# Altium PCB qav90.PcbDoc (part 7 of 7)
Units mm, origin at the board's own origin, x right, y up, seen from the top; angles counter-clockwise.
Board outline 90 x 90 mm, 3 copper layers (Top Layer, Mid-Layer 1, Bottom Layer); 214 components, 77 nets, 727 pads, 256 vias.
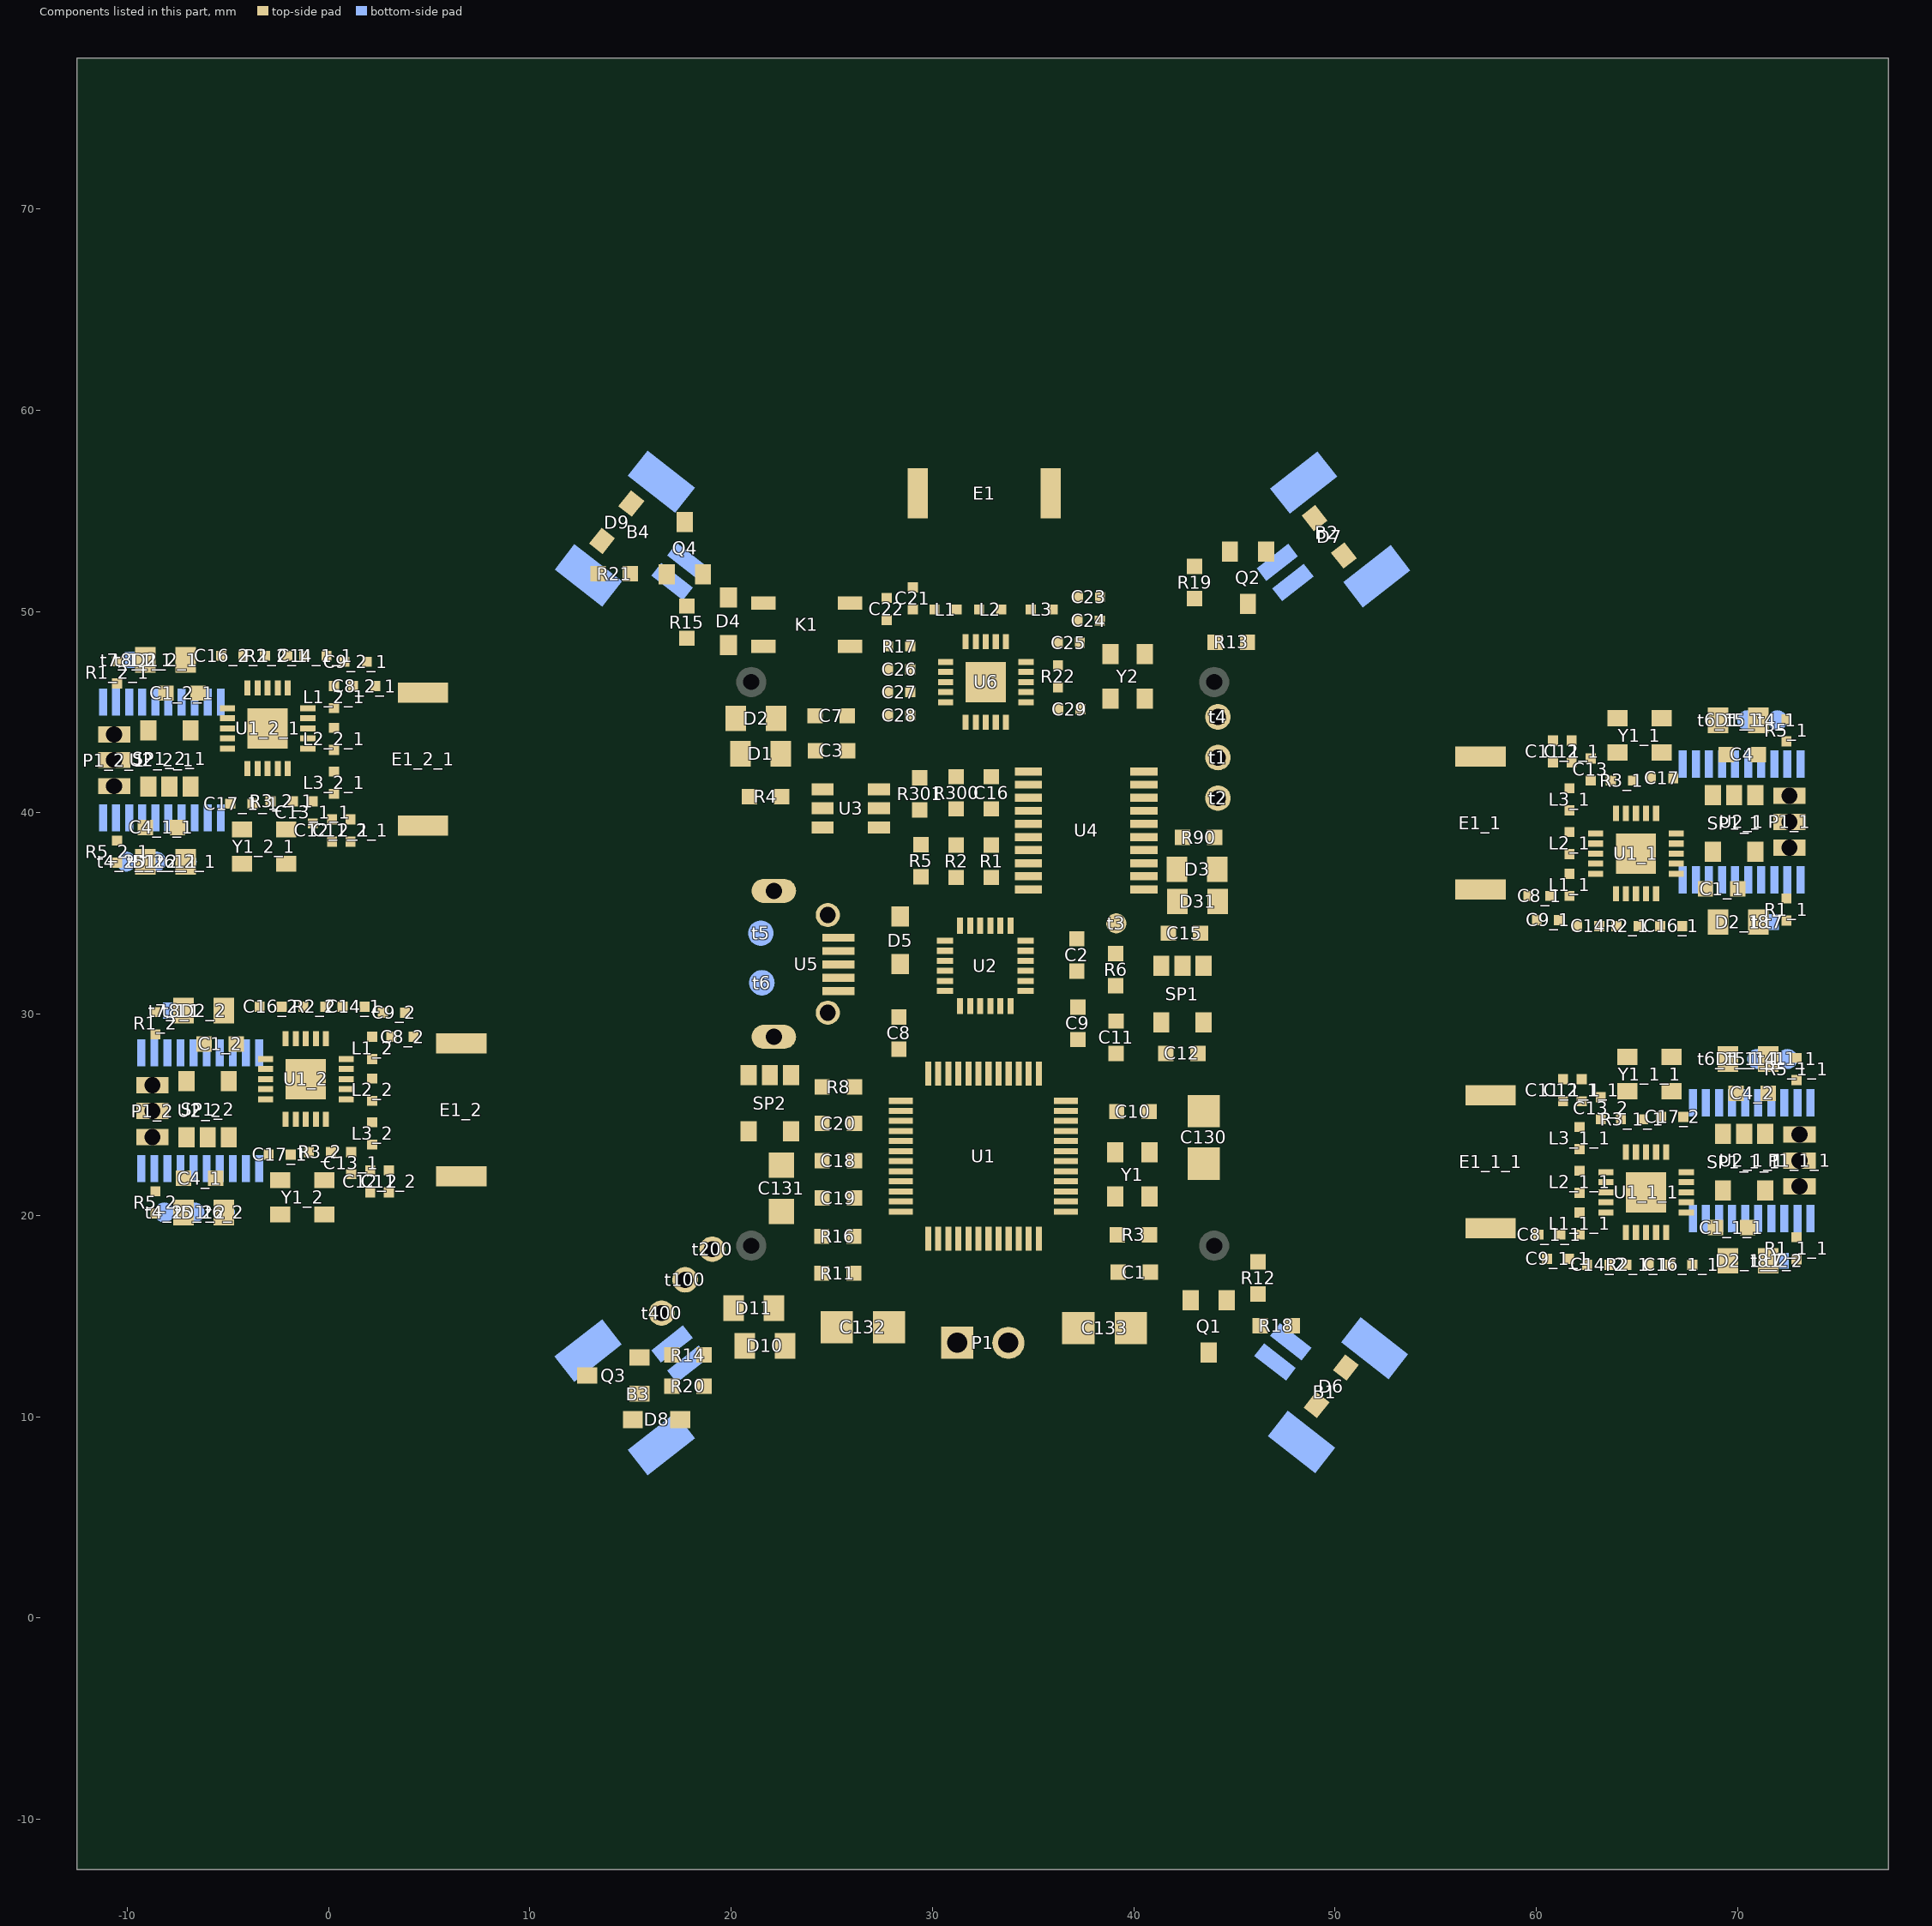
[diagram p7: the components of this part, seen from the top]

## Via types
v1: diameter 0.55, hole 0.25, Top Layer to Bottom Layer, tented both sides, 248 vias
v2: diameter 0.55, hole 0.25, Top Layer to Bottom Layer, 8 vias

## Nets (pads, with @x,y where several pads share a name; then routed paths per layer and width w, separated by ;. In a path a pad name is that pad's centre, name@x,y a point inside that pad or via, vN(x,y) a via of type N, cw(c..) or ccw(c..) an arc to the next point about the centre after c; other vN are vias at no path point) (continued)
copper on no net: (continued)
  Bottom Layer w0.508: -11.2,45.5 -11.2,44.45 ; -10.65,42.625 -10.25,42.625 ; -10.205,43.761 cw(c-10.088,43.398) -9.818,43.668 ; -9.3,28.075 -9.3,27.025 ; v1(-9.281,43.173) -9.281,43.221 -9.96,43.9 -10.65,43.9 -11.2,44.45 ; -9.2,47.6 -8.75,48.05 ; -8.75,25.2 -8.35,25.2 ; -8.6,39.75 -8.6,45.5 -8.6,46.675 -8.075,47.2 -5.975,47.2 -5.619,47.556 -4.431,47.556 -3.513,46.638 -3.438,46.638 ; -8.305,26.336 cw(c-8.188,25.973) -7.918,26.243 ; -7.925,39.725 -7.925,38.45 -7.05,37.575 ; -7.906,39.783 -7.906,41.269 v1(-7.9,41.275) -7.875,41.3 v1(-7.875,43.675) ; v1(-7.381,25.748) -7.381,25.796 -8.06,26.475 -8.75,26.475 -9.3,27.025 ; -7.3,30.175 -6.85,30.625 ; -6.7,22.325 -6.7,28.075 -6.7,29.25 -6.175,29.775 -4.075,29.775 -3.719,30.131 -2.531,30.131 -1.613,29.213 -1.538,29.213 ; v1(-6.1,48.05) -8.75,48.05 ; -6.025,22.3 -6.025,21.025 -5.15,20.15 ; -6.006,22.358 -6.006,23.844 v1(-6,23.85) -5.975,23.875 v1(-5.975,26.25) ; v1(-5.375,38.425) -0.975,38.425 v1(-0.5,38.9) -1.2,39.6 -1.2,44.2 ; v1(-4.2,30.625) -6.85,30.625 ; v1(-3.525,41.275) -4.025,41.775 -4.025,46.05 -3.438,46.638 ; v1(-3.475,21) 0.925,21 v1(1.4,21.475) 0.7,22.175 0.7,26.775 ; v1(-3.15,47.775) v1@-0.15,47.775 ; v1(-2.525,43.725) -2.05,44.2 -1.2,44.2 ; v1(-1.625,23.85) -2.125,24.35 -2.125,28.625 -1.538,29.213 ; v1(-1.25,30.35) v1@1.75,30.35 ; v1(-0.925,46.875) -1.1,47.05 v1(-3.025,47.05) -3.438,46.638 ; v1(-0.625,26.3) -0.15,26.775 0.7,26.775 ; v1(-0.125,47.75) -0.125,45.275 -1.2,44.2 ; v1(0.975,29.45) 0.8,29.625 v1(-1.125,29.625) -1.538,29.213 ; v1(1.775,30.325) 1.775,27.85 0.7,26.775 ; v1(62.05,34.425) 62.05,36.9 63.125,37.975 ; v1@62.075,34.4 v1(65.075,34.4) ; v1(62.55,17.6) 62.55,20.075 63.625,21.15 ; v1@62.575,17.575 v1(65.575,17.575) ; v1(62.85,35.3) 63.025,35.125 v1(64.95,35.125) 65.363,35.538 ; v1(63.35,18.475) 63.525,18.3 v1(65.45,18.3) 65.863,18.713 ; v1(64.45,38.45) 63.975,37.975 63.125,37.975 ; v1(64.95,21.625) 64.475,21.15 63.625,21.15 ; v1(65.45,40.9) 65.95,40.4 65.95,36.125 65.363,35.538 ; v1(65.95,24.075) 66.45,23.575 66.45,19.3 65.863,18.713 ; v1(67.3,43.75) 62.9,43.75 v1(62.425,43.275) 63.125,42.575 63.125,37.975 ; v1(67.8,26.925) 63.4,26.925 v1(62.925,26.45) 63.625,25.75 63.625,21.15 ; v1(68.025,34.125) 70.675,34.125 ; v1(68.525,17.3) 71.175,17.3 ; 68.975,44.6 69.85,43.725 69.85,42.45 ; 69.475,27.775 70.35,26.9 70.35,25.625 ; v1(69.8,38.5) 69.8,40.875 v1(69.825,40.9) 69.831,40.906 69.831,42.392 ; v1(70.3,21.675) 70.3,24.05 v1(70.325,24.075) 70.331,24.081 70.331,25.567 ; 70.525,42.425 70.525,36.675 70.525,35.5 70,34.975 67.9,34.975 67.544,34.619 66.356,34.619 65.438,35.538 65.363,35.538 ; 71.025,25.6 71.025,19.85 71.025,18.675 70.5,18.15 68.4,18.15 68.044,17.794 66.856,17.794 65.938,18.713 65.863,18.713 ; 71.125,34.575 70.675,34.125 ; v1(71.206,39.002) 71.206,38.954 71.885,38.275 72.575,38.275 73.125,37.725 ; 71.625,17.75 71.175,17.3 ; v1(71.706,22.177) 71.706,22.129 72.385,21.45 73.075,21.45 73.625,20.9 ; 71.743,38.507 ccw(c72.013,38.777) 72.13,38.414 ; 72.175,39.55 72.575,39.55 ; 72.243,21.682 ccw(c72.513,21.952) 72.63,21.589 ; 72.675,22.725 73.075,22.725 ; 73.125,36.675 73.125,37.725 ; 73.625,19.85 73.625,20.9 ; -11.2,44.45 ccw(c-10.687,44.45) -10.97,44.022 ; -11.2,44.45 cw(c-11.45,44.2) -11.167,43.987 ; -11.2,44.45 ccw(c-10.687,44.45) -10.97,44.022 ; -11.2,44.45 cw(c-11.45,44.2) -11.167,43.987 ; -11.2,44.45 ccw(c-10.687,44.45) -10.97,44.022 ; -11.2,44.45 cw(c-11.45,44.2) -11.167,43.987 ; -11.2,44.615 ccw(c-10.335,44.615) -10.947,44.003 ; -11.2,44.615 ccw(c-10.335,44.615) -10.947,44.003 ; -11.2,44.615 ccw(c-10.335,44.615) -10.947,44.003 ; -11.161,43.995 ccw(c-11.374,44.179) -11.13,44.32 ; -11.161,43.995 ccw(c-11.374,44.179) -11.13,44.32 ; -11.161,43.995 ccw(c-11.374,44.179) -11.13,44.32 ; -10.25,43.754 cw(c-10.25,42.702) -9.506,43.446 ; -10.25,43.754 cw(c-10.25,42.702) -9.506,43.446 ; -10.25,43.754 cw(c-10.25,42.702) -9.506,43.446 ; -10.124,43.973 ccw(c-9.401,44.39) -9.617,43.584 ; -10.124,43.973 ccw(c-9.401,44.39) -9.617,43.584 ; -10.124,43.973 ccw(c-9.401,44.39) -9.617,43.584 ; -9.523,43.456 cw(c-9.76,43.044) v1@-9.302,43.167 ; -9.523,43.456 cw(c-9.76,43.044) v1@-9.302,43.167 ; -9.523,43.456 cw(c-9.76,43.044) v1@-9.302,43.167 ; -9.523,43.456 cw(c-9.76,43.044) v1@-9.302,43.167 ; -9.523,43.456 cw(c-9.76,43.044) v1@-9.302,43.167 ; -9.523,43.456 cw(c-9.76,43.044) v1@-9.302,43.167 ; -9.3,27.025 cw(c-9.55,26.775) -9.267,26.562 ; -9.3,27.025 ccw(c-8.787,27.025) -9.07,26.597 ; -9.3,27.025 cw(c-9.55,26.775) -9.267,26.562 ; -9.3,27.025 ccw(c-8.787,27.025) -9.07,26.597 ; -9.3,27.025 cw(c-9.55,26.775) -9.267,26.562 ; -9.3,27.025 ccw(c-8.787,27.025) -9.07,26.597 ; -9.3,27.19 ccw(c-8.435,27.19) -9.047,26.578 ; -9.3,27.19 ccw(c-8.435,27.19) -9.047,26.578 ; -9.3,27.19 ccw(c-8.435,27.19) -9.047,26.578 ; -9.261,26.57 ccw(c-9.474,26.754) -9.23,26.895 ; -9.261,26.57 ccw(c-9.474,26.754) -9.23,26.895 ; -9.261,26.57 ccw(c-9.474,26.754) -9.23,26.895 ; -9.204,47.752 cw(c-8.75,47.556) -8.75,48.05 ; -9.204,47.752 cw(c-8.75,47.556) -8.75,48.05 ; -9.204,47.752 cw(c-8.75,47.556) -8.75,48.05 ; -9.203,47.753 cw(c-8.485,47.035) -8.485,48.05 ; -9.203,47.753 cw(c-8.485,47.035) -8.485,48.05 ; -9.203,47.753 cw(c-8.485,47.035) -8.485,48.05 ; -9.2,47.746 ccw(c-9.2,48.098) -8.951,47.849 ; -9.2,47.746 ccw(c-9.2,48.098) -8.951,47.849 ; -9.2,47.746 ccw(c-9.2,48.098) -8.951,47.849 ; v1@-8.965,44.04 ccw(c-9.846,44.921) -8.6,44.921 ; v1@-8.965,44.04 ccw(c-9.846,44.921) -8.6,44.921 ; v1@-8.965,44.04 ccw(c-9.846,44.921) -8.6,44.921 ; -8.35,26.329 cw(c-8.35,25.277) -7.606,26.021 ; -8.35,26.329 cw(c-8.35,25.277) -7.606,26.021 ; -8.35,26.329 cw(c-8.35,25.277) -7.606,26.021 ; -8.224,26.548 ccw(c-7.501,26.965) -7.717,26.159 ; -8.224,26.548 ccw(c-7.501,26.965) -7.717,26.159 ; -8.224,26.548 ccw(c-7.501,26.965) -7.717,26.159 ; -7.623,26.031 cw(c-7.86,25.619) v1@-7.402,25.742 ; -7.623,26.031 cw(c-7.86,25.619) v1@-7.402,25.742 ; -7.623,26.031 cw(c-7.86,25.619) v1@-7.402,25.742 ; -7.623,26.031 cw(c-7.86,25.619) v1@-7.402,25.742 ; -7.623,26.031 cw(c-7.86,25.619) v1@-7.402,25.742 ; -7.623,26.031 cw(c-7.86,25.619) v1@-7.402,25.742 ; -7.47,37.995 cw(c-7.89,37.575) -7.296,37.575 ; -7.47,37.995 ccw(c-7.05,38.415) -7.05,37.821 ; -7.47,37.995 cw(c-7.89,37.575) -7.296,37.575 ; -7.47,37.995 ccw(c-7.05,38.415) -7.05,37.821 ; -7.47,37.995 cw(c-7.89,37.575) -7.296,37.575 ; -7.47,37.995 ccw(c-7.05,38.415) -7.05,37.821 ; -7.304,30.327 cw(c-6.85,30.131) -6.85,30.625 ; -7.304,30.327 cw(c-6.85,30.131) -6.85,30.625 ; -7.304,30.327 cw(c-6.85,30.131) -6.85,30.625 ; -7.303,30.328 cw(c-6.585,29.61) -6.585,30.625 ; -7.303,30.328 cw(c-6.585,29.61) -6.585,30.625 ; -7.303,30.328 cw(c-6.585,29.61) -6.585,30.625 ; -7.3,30.321 ccw(c-7.3,30.673) -7.051,30.424 ; -7.3,30.321 ccw(c-7.3,30.673) -7.051,30.424 ; -7.3,30.321 ccw(c-7.3,30.673) -7.051,30.424 ; v1@-7.065,26.615 ccw(c-7.946,27.496) -6.7,27.496 ; v1@-7.065,26.615 ccw(c-7.946,27.496) -6.7,27.496 ; v1@-7.065,26.615 ccw(c-7.946,27.496) -6.7,27.496 ; -5.57,20.57 ccw(c-5.15,20.99) -5.15,20.396 ; -5.57,20.57 cw(c-5.99,20.15) -5.396,20.15 ; -5.57,20.57 ccw(c-5.15,20.99) -5.15,20.396 ; -5.57,20.57 cw(c-5.99,20.15) -5.396,20.15 ; -5.57,20.57 ccw(c-5.15,20.99) -5.15,20.396 ; -5.57,20.57 cw(c-5.99,20.15) -5.396,20.15 ; -1.398,47.05 cw(c-1.398,46.402) v1@-0.94,46.86 ; -1.398,47.05 cw(c-1.398,46.402) v1@-0.94,46.86 ; -1.398,47.05 cw(c-1.398,46.402) v1@-0.94,46.86 ; 0.502,29.625 cw(c0.502,28.977) v1@0.96,29.435 ; 0.502,29.625 cw(c0.502,28.977) v1@0.96,29.435 ; 0.502,29.625 cw(c0.502,28.977) v1@0.96,29.435 ; v1@62.865,35.315 ccw(c63.323,35.773) 63.323,35.125 ; v1@62.865,35.315 ccw(c63.323,35.773) 63.323,35.125 ; v1@62.865,35.315 ccw(c63.323,35.773) 63.323,35.125 ; v1@63.365,18.49 ccw(c63.823,18.948) 63.823,18.3 ; v1@63.365,18.49 ccw(c63.823,18.948) 63.823,18.3 ; v1@63.365,18.49 ccw(c63.823,18.948) 63.823,18.3 ; 68.975,44.354 cw(c68.975,43.76) 69.395,44.18 ; 68.975,44.354 cw(c68.975,43.76) 69.395,44.18 ; 68.975,44.354 cw(c68.975,43.76) 69.395,44.18 ; 69.221,44.6 ccw(c69.815,44.6) 69.395,44.18 ; 69.221,44.6 ccw(c69.815,44.6) 69.395,44.18 ; 69.221,44.6 ccw(c69.815,44.6) 69.395,44.18 ; 69.475,27.529 cw(c69.475,26.935) 69.895,27.355 ; 69.475,27.529 cw(c69.475,26.935) 69.895,27.355 ; 69.475,27.529 cw(c69.475,26.935) 69.895,27.355 ; 69.721,27.775 ccw(c70.315,27.775) 69.895,27.355 ; 69.721,27.775 ccw(c70.315,27.775) 69.895,27.355 ; 69.721,27.775 ccw(c70.315,27.775) 69.895,27.355 ; 70.41,34.125 ccw(c70.41,35.14) 71.128,34.422 ; 70.41,34.125 ccw(c70.41,35.14) 71.128,34.422 ; 70.41,34.125 ccw(c70.41,35.14) 71.128,34.422 ; 70.525,37.254 cw(c71.771,37.254) v1@70.89,38.135 ; 70.525,37.254 cw(c71.771,37.254) v1@70.89,38.135 ; 70.525,37.254 cw(c71.771,37.254) v1@70.89,38.135 ; 70.675,34.125 ccw(c70.675,34.619) 71.129,34.423 ; 70.675,34.125 ccw(c70.675,34.619) 71.129,34.423 ; 70.675,34.125 ccw(c70.675,34.619) 71.129,34.423 ; 70.876,34.326 cw(c71.125,34.077) 71.125,34.429 ; 70.876,34.326 cw(c71.125,34.077) 71.125,34.429 ; 70.876,34.326 cw(c71.125,34.077) 71.125,34.429 ; 70.91,17.3 ccw(c70.91,18.315) 71.628,17.597 ; 70.91,17.3 ccw(c70.91,18.315) 71.628,17.597 ; 70.91,17.3 ccw(c70.91,18.315) 71.628,17.597 ; 71.025,20.429 cw(c72.271,20.429) v1@71.39,21.31 ; 71.025,20.429 cw(c72.271,20.429) v1@71.39,21.31 ; 71.025,20.429 cw(c72.271,20.429) v1@71.39,21.31 ; 71.175,17.3 ccw(c71.175,17.794) 71.629,17.598 ; 71.175,17.3 ccw(c71.175,17.794) 71.629,17.598 ; 71.175,17.3 ccw(c71.175,17.794) 71.629,17.598 ; v1@71.227,39.008 ccw(c71.685,39.131) 71.448,38.719 ; v1@71.227,39.008 ccw(c71.685,39.131) 71.448,38.719 ; v1@71.227,39.008 ccw(c71.685,39.131) 71.448,38.719 ; v1@71.227,39.008 ccw(c71.685,39.131) 71.448,38.719 ; v1@71.227,39.008 ccw(c71.685,39.131) 71.448,38.719 ; v1@71.227,39.008 ccw(c71.685,39.131) 71.448,38.719 ; 71.376,17.501 cw(c71.625,17.252) 71.625,17.604 ; 71.376,17.501 cw(c71.625,17.252) 71.625,17.604 ; 71.376,17.501 cw(c71.625,17.252) 71.625,17.604 ; 71.431,38.729 ccw(c72.175,39.473) 72.175,38.421 ; 71.431,38.729 ccw(c72.175,39.473) 72.175,38.421 ; 71.431,38.729 ccw(c72.175,39.473) 72.175,38.421 ; 71.542,38.591 cw(c71.326,37.785) 72.049,38.202 ; 71.542,38.591 cw(c71.326,37.785) 72.049,38.202 ; 71.542,38.591 cw(c71.326,37.785) 72.049,38.202 ; v1@71.727,22.183 ccw(c72.185,22.306) 71.948,21.894 ; v1@71.727,22.183 ccw(c72.185,22.306) 71.948,21.894 ; v1@71.727,22.183 ccw(c72.185,22.306) 71.948,21.894 ; v1@71.727,22.183 ccw(c72.185,22.306) 71.948,21.894 ; v1@71.727,22.183 ccw(c72.185,22.306) 71.948,21.894 ; v1@71.727,22.183 ccw(c72.185,22.306) 71.948,21.894 ; 71.931,21.904 ccw(c72.675,22.648) 72.675,21.596 ; 71.931,21.904 ccw(c72.675,22.648) 72.675,21.596 ; 71.931,21.904 ccw(c72.675,22.648) 72.675,21.596 ; 72.042,21.766 cw(c71.826,20.96) 72.549,21.377 ; 72.042,21.766 cw(c71.826,20.96) 72.549,21.377 ; 72.042,21.766 cw(c71.826,20.96) 72.549,21.377 ; 72.872,38.172 cw(c72.26,37.56) 73.125,37.56 ; 72.872,38.172 cw(c72.26,37.56) 73.125,37.56 ; 72.872,38.172 cw(c72.26,37.56) 73.125,37.56 ; 72.895,38.153 cw(c72.612,37.725) 73.125,37.725 ; 72.895,38.153 cw(c72.612,37.725) 73.125,37.725 ; 72.895,38.153 cw(c72.612,37.725) 73.125,37.725 ; 73.055,37.855 cw(c73.299,37.996) 73.086,38.18 ; 73.055,37.855 cw(c73.299,37.996) 73.086,38.18 ; 73.055,37.855 cw(c73.299,37.996) 73.086,38.18 ; 73.092,38.188 ccw(c73.375,37.975) 73.125,37.725 ; 73.092,38.188 ccw(c73.375,37.975) 73.125,37.725 ; 73.092,38.188 ccw(c73.375,37.975) 73.125,37.725 ; 73.372,21.347 cw(c72.76,20.735) 73.625,20.735 ; 73.372,21.347 cw(c72.76,20.735) 73.625,20.735 ; 73.372,21.347 cw(c72.76,20.735) 73.625,20.735 ; 73.395,21.328 cw(c73.112,20.9) 73.625,20.9 ; 73.395,21.328 cw(c73.112,20.9) 73.625,20.9 ; 73.395,21.328 cw(c73.112,20.9) 73.625,20.9 ; 73.555,21.03 cw(c73.799,21.171) 73.586,21.355 ; 73.555,21.03 cw(c73.799,21.171) 73.586,21.355 ; 73.555,21.03 cw(c73.799,21.171) 73.586,21.355 ; 73.592,21.363 ccw(c73.875,21.15) 73.625,20.9 ; 73.592,21.363 ccw(c73.875,21.15) 73.625,20.9 ; 73.592,21.363 ccw(c73.875,21.15) 73.625,20.9
  other v1: 73.575,18.4 67.9,18.625 -4.05,19.825 65.75,20.7 65.75,21.55 68.35,23.825 -4.025,24.1 68.425,24.775 -1.425,26.375 -1.425,27.225 68.375,28.1 -3.575,29.3 -9.25,29.525 73.075,35.225 67.4,35.45 -5.95,37.25 65.25,37.525 65.25,38.375 67.85,40.65 -5.925,41.525 67.925,41.6 -3.325,43.8 -3.325,44.65 67.875,44.925 -5.475,46.725 -11.15,46.95
  other v2: 2.125,20 1.125,20.025 63.2,27.9 62.2,27.925 0.225,37.425 -0.775,37.45 62.7,44.725 61.7,44.75

## Polygon pours and split planes (outlines as drawn)
no net on Top Layer "Keep-Out Layer-No Net" (solid, remove dead copper, pour order 6): 8.275,49.575 7.55,48.85 7.55,33.775 -13.5,33.775 -14.45,34.725 -13.75,35.425 -13.75,49.45
no net on Top Layer "Keep-Out Layer-No Net" (solid, remove dead copper, pour order 6): 54.15,15.775 54.875,16.5 54.875,31.575 75.925,31.575 76.875,30.625 76.175,29.925 76.175,15.9
no net on Top Layer "Keep-Out Layer-No Net" (solid, remove dead copper, pour order 6): 10.175,32.15 9.45,31.425 9.45,16.35 -11.6,16.35 -12.55,17.3 -11.85,18 -11.85,32.025
no net on Top Layer "Keep-Out Layer-No Net" (solid, remove dead copper, pour order 6): 53.65,32.6 54.375,33.325 54.375,48.4 75.425,48.4 76.375,47.45 75.675,46.75 75.675,32.725
GND on Top Layer "Keep-Out Layer-No Net" (solid, remove dead copper, pour order 5): 2.05,67.3 8,61.35 67.675,61.35 67.675,12.6 61.65,6.575 56.1,1.025 9.025,1.025
no net on Bottom Layer "Keep-Out Layer-No Net" (solid, remove dead copper, pour order 8): 7.7,48.25 7.7,33.9 8.35,33.25 7.675,33.925 -13.3,33.925 -13.3,49.575 -12.8,50.075
no net on Bottom Layer "Keep-Out Layer-No Net" (solid, remove dead copper, pour order 8): 54.725,17.1 54.725,31.45 54.075,32.1 54.75,31.425 75.725,31.425 75.725,15.775 75.225,15.275
no net on Bottom Layer "Keep-Out Layer-No Net" (solid, remove dead copper, pour order 8): 9.6,30.825 9.6,16.475 10.25,15.825 9.575,16.5 -11.4,16.5 -11.4,32.15 -10.9,32.65
no net on Bottom Layer "Keep-Out Layer-No Net" (solid, remove dead copper, pour order 8): 54.225,33.925 54.225,48.275 53.575,48.925 54.25,48.25 75.225,48.25 75.225,32.6 74.725,32.1
GND on Bottom Layer "Keep-Out Layer-No Net" (solid, remove dead copper, pour order 7): 4.825,64.125 59.35,64.125 59.825,63.65 61.1,62.375 61.1,16.1 61.1,6.575 53.4,-1.125 52.05,0.225 7.6,0.225

## Keep-outs
Keep-Out Layer:
  circle w0.254: c2.875,2.5 r1
  circle w0.254: c62.325,2.575 r1
  circle w0.254: c62.125,62.675 r1
  circle w0.254: c2.85,62.5 r1
  lines w0.25: 5.717,57.273 10.814,53.291 ; 5.93,7.893 10.745,11.655 ; 8.809,2.528 14.374,6.876 ; 9.366,62.037 14.345,58.146 ; 50.605,6.893 55.86,2.787 ; 50.626,58.124 56.072,62.379 ; 54.229,11.676 59.259,7.746 ; 54.25,53.341 59.109,57.137
  lines w0.254: 1.012,6.926 ccw(c0,0) 6.904,-1.155 ; 1.019,6.933 ccw(c2.043,14.651) 6.072,7.989 ; 1.094,58.079 cw(c2.118,50.361) 5.74,57.253 ; 1.155,58.096 cw(c0,65) 6.879,66.298 ; 2.572,2.411 ccw(c0,0) 2.59,2.391 ; 2.572,62.589 cw(c0,65) 2.602,62.621 ; 6.25,38.65 cw(c4.25,38.65) 4.25,36.65 -9.75,36.65 cw(c-9.75,38.65) -11.75,38.65 -11.75,46.65 cw(c-9.75,46.65) -9.75,48.65 4.25,48.65 cw(c4.25,46.65) 6.25,46.65 6.25,44.825 ; 6.275,38.8 14.875,38.8 ccw(c15.963,39.837) 17,38.75 20,38.75 20,26.728 17.111,26.728 ccw(c16.074,25.64) 14.986,26.678 8.153,26.678 ; 6.3,44.825 14.875,44.825 15.85,44.825 16.775,43.9 16.775,42.075 19.525,42.075 ; 6.887,66.294 ccw(c14.518,67.839) 9.35,62.016 ; 6.9,-1.218 cw(c14.531,-2.763) 8.814,2.523 ; 8.15,26.678 8.15,29.225 ccw(c6.15,29.225) 6.15,31.225 -7.85,31.225 ccw(c-7.85,29.225) -9.85,29.225 -9.85,21.225 ccw(c-7.85,21.225) -7.85,19.225 6.15,19.225 ccw(c6.15,21.225) 8.15,21.225 10.05,21.225 10.622,20.653 14.986,20.653 15.961,20.653 16.886,21.578 16.886,23.403 19.636,23.403 ; 10.75,11.659 cw(c14.633,11.242) 15.02,15.128 ; 10.777,53.263 ccw(c14.724,53.908) 14.982,49.917 ; 14.293,58.129 cw(c15.029,54.293) 18.915,54.684 ; 14.375,6.875 ccw(c14.913,10.837) 18.875,10.3 ; 14.981,49.928 cw(c3.625,38.125) 19.517,42.092 ; 15.017,15.132 ccw(c3.748,26.847) 19.634,23.403 ; 18.845,10.288 cw(c26.755,-2.71) 26.922,12.504 ; 18.914,54.683 ccw(c27.311,69.689) 26.25,52.527 ; 26.25,52.525 ccw(c26.263,54.512) 28.25,54.5 28.25,56.9 cw(c28.863,56.887) 28.875,57.5 ; 26.755,12.5 35.5,12.5 38.267,12.5 ; 28.85,57.5 36.125,57.5 ; 36.15,57.5 cw(c36.138,56.887) 36.75,56.875 36.75,54.475 ; 36.75,54.5 ccw(c38.737,54.512) 38.75,52.525 ; 38.1,12.504 cw(c38.267,-2.633) 46.137,10.299 ; 38.738,52.526 ccw(c37.689,69.689) 46.123,54.704 ; 45.364,23.403 48.114,23.403 48.114,21.578 49.039,20.653 50.014,20.653 56.122,20.653 ; 45.368,23.404 ccw(c61.375,26.875) 49.983,15.106 ; 45.479,42.074 cw(c61.375,38.125) 49.97,49.882 ; 45.479,42.075 48.225,42.075 48.225,43.9 49.15,44.825 50.125,44.825 50.125,41.925 ; 46.093,10.243 ccw(c49.971,10.707) 50.707,6.871 ; 46.125,54.7 cw(c50.087,54.163) 50.625,58.125 ; 49.98,49.872 ccw(c50.367,53.758) 54.25,53.341 ; 49.985,15.08 cw(c50.276,11.092) 54.223,11.737 ; 50.014,26.7 50.014,29.003 ccw(c48.926,27.965) 47.889,29.053 47.889,26.728 45,26.728 45,38.75 48,38.75 48,36.425 ccw(c49.037,37.512) 50.125,36.475 55.675,36.475 55.675,35.525 ccw(c57.675,35.525) 57.675,33.525 71.675,33.525 ccw(c71.675,35.525) 73.675,35.525 73.675,43.525 ccw(c71.675,43.525) 71.675,45.525 57.675,45.525 ccw(c57.675,43.525) 55.675,43.525 55.675,41.925 50.175,41.925 ; 50.025,26.7 56.175,26.7 cw(c58.175,26.7) 58.175,28.7 72.175,28.7 cw(c72.175,26.7) 74.175,26.7 74.175,18.7 cw(c72.175,18.7) 72.175,16.7 58.175,16.7 cw(c58.175,18.7) 56.175,18.7 56.175,20.653 ; 55.758,2.887 cw(c50.482,-2.839) 58.113,-1.294 ; 56.083,62.368 ccw(c50.469,67.763) 58.1,66.218 ; 58.096,66.155 cw(c65,65) 63.988,58.074 ; 58.121,-1.298 ccw(c65,0) 63.845,6.904 ; 59.135,57.131 cw(c62.957,50.349) 63.981,58.067 ; 59.26,7.747 ccw(c62.882,14.639) 63.906,6.921 ; 61.883,63.353 cw(c65,65) 61.899,63.324 ; 61.915,1.705 ccw(c65,0) 61.933,1.738

## Other copper
Top Layer:
  pour cut-out: -11.75,45.175 -9.375,45.175 -9.375,40.15 -11.75,40.15
  pour cut-out: 0.65,45 0.65,48.675 0.675,48.65 4.825,48.65 5.2,48.4 5.475,48.3 5.575,48.15 6.1,47.6 6.175,47.2 6.25,47.025 6.25,37.975 5.675,37.325 5.575,37.1 5.35,37.025 4.95,36.775 3.1,36.625 0.675,36.65 0.575,36.65
  pour cut-out: 74.175,20.175 71.8,20.175 71.8,25.2 74.175,25.2
  pour cut-out: 61.775,20.35 61.775,16.675 61.75,16.7 57.6,16.7 57.225,16.95 56.95,17.05 56.85,17.2 56.325,17.75 56.25,18.15 56.175,18.325 56.175,27.375 56.75,28.025 56.85,28.25 57.075,28.325 57.475,28.575 59.325,28.725 61.75,28.7 61.85,28.7
  pour cut-out: 2.55,27.575 2.55,31.25 2.575,31.225 6.725,31.225 7.1,30.975 7.375,30.875 7.475,30.725 8,30.175 8.075,29.775 8.15,29.6 8.15,20.55 7.575,19.9 7.475,19.675 7.25,19.6 6.85,19.35 5,19.2 2.575,19.225 2.475,19.225
  pour cut-out: -9.85,27.75 -7.475,27.75 -7.475,22.725 -9.85,22.725
  pour cut-out: 61.275,37.175 61.275,33.5 61.25,33.525 57.1,33.525 56.725,33.775 56.45,33.875 56.35,34.025 55.825,34.575 55.75,34.975 55.675,35.15 55.675,44.2 56.25,44.85 56.35,45.075 56.575,45.15 56.975,45.4 58.825,45.55 61.25,45.525 61.35,45.525
  pour cut-out: 73.675,37 71.3,37 71.3,42.025 73.675,42.025
  region net GND: 14.95,13.325 14.95,14.05 15.3,14.825 16.225,15.75 16.85,15.75 17.225,15.375 17.175,15.05 17.1,14.65 16.675,14.525 16.025,13.975 15.725,12.775 15.275,12.775 15.075,12.85
  pour cut-out: 24.932,52.567 26.25,51.125 26.425,50.95 26.608,50.678 29.479,50.5 32.603,50.5 35.956,50.475 37.505,50.526 38.575,51 38.738,51.163 40.401,53.329 38.738,56.162 37.4,57.5 28.125,57.5 27.025,56.4
  pour cut-out: 31.079,33.924 31.104,33.949 34.127,33.949 34.127,30.876 34.076,30.825 31.053,30.825
  pour cut-out: 30.456,48.775 34.925,48.775 34.925,44.225 30.375,44.225
  pour cut-out: 44.566,45.862 45.049,45.608 45.455,45.328 46.039,45.201 46.42,44.82 46.293,44.693 46.293,44.211 45.989,43.906 45.989,43.372 45.684,43.068 45.684,42.483 45.455,42.255 45.455,41.493 45.252,41.29 45.252,40.35 45.049,40.147 44.871,39.994 44.617,39.816 44.592,39.791 44.338,39.74 43.855,39.715 43.322,40.096 43.169,40.68 43.042,42.941 43.042,44.82 43.118,45.277 43.423,45.658 43.83,45.862 44.236,45.912
  pour cut-out: 18.404,19.725 18.557,19.725 18.988,19.293 19.547,19.293 19.928,18.912 20.03,18.607 20.081,18.328 20.055,18.049 20.004,17.998 20.004,17.795 18.912,16.702 18.76,16.499 17.718,15.255 17.414,14.594 17.007,14.188 16.753,14.112 16.423,14.086 16.22,14.112 16.093,14.188 15.255,14.874 15.255,15.305
  pour cut-out: 12.4,59.725 9.225,55.602 8.75,54.963 8.975,54.787 10.525,53.442 13.977,57.867 14.35,58.201
  pour cut-out: 52.687,59.762 55.862,55.638 56.337,54.999 56.112,54.823 54.562,53.478 51.11,57.904 50.737,58.238
  pour cut-out: 52.463,5.388 55.638,9.512 56.113,10.151 55.888,10.327 54.338,11.672 50.885,7.246 50.512,6.912
  pour cut-out: 12.449,5.354 9.274,9.478 8.799,10.117 9.024,10.293 10.574,11.638 14.026,7.212 14.399,6.878
  pour cut-out: 30.375,14.475 30.3,14.4 29.575,14.4 29.575,12.45 29.625,12.5 35.025,12.5 35.025,14.45 34.75,14.5 34.175,14.475
  region net 4V3: 50.4,52.113 49.7,51.938 47.7,50.512 47.35,50.512 46.975,51.05 47.35,51.338 49,52.713 49.695,52.857 50.325,53.363 50.45,53.413 50.575,53.317 50.75,53.112 51.05,52.637
  region net NetB2_2: 46.6,51.85 46.225,52.225 46.2,52.2 45.85,52.2 45.275,51.625 45.275,50.45 45.8,50.45 46.6,51.25
  region net NetB2_2: 49.6,54.5 49.1,54 49.034,53.783 48.975,53.599 48.1,52.724 48.1,52.7 48.075,52.7 47.55,53.225 47.675,53.35 47.6,53.8 47.675,54.2 48.55,55.075 48.725,55.075 49.038,55.037
  region net 4V3: 13.6,52.9 13.75,52.9 14.325,52.325 14.575,52.575 14.8,52.575 15.225,53 15.125,53.1 15.125,53.4 14.942,53.4 14.164,54.178 14.131,54.144 13.434,54.05 13.313,53.763 12.925,53.375
  region net 4V3: 50.625,13.025 49.425,14.225 48.8,14.225 48.15,13.575 48.15,13 48.275,13 49.875,12.275 50.816,11.81 51.075,12.375 51.05,12.575
  region net NetB1_1: 43.325,13.7 43.575,13.95 45.5,13.95 46.1,13.35 46,13.25 46,11.625 44.8,11.625 44.025,12.4 43.375,12.4 43.375,12.625 43.325,12.675
Bottom Layer:
  pour cut-out: 0.65,45 0.65,48.675 0.675,48.65 4.825,48.65 5.2,48.4 5.475,48.3 5.575,48.15 6.1,47.6 6.175,47.2 6.25,47.025 6.25,37.975 5.675,37.325 5.575,37.1 5.35,37.025 4.95,36.775 3.1,36.625 0.675,36.65 0.575,36.65
  pour cut-out: 61.775,20.35 61.775,16.675 61.75,16.7 57.6,16.7 57.225,16.95 56.95,17.05 56.85,17.2 56.325,17.75 56.25,18.15 56.175,18.325 56.175,27.375 56.75,28.025 56.85,28.25 57.075,28.325 57.475,28.575 59.325,28.725 61.75,28.7 61.85,28.7
  pour cut-out: 2.55,27.575 2.55,31.25 2.575,31.225 6.725,31.225 7.1,30.975 7.375,30.875 7.475,30.725 8,30.175 8.075,29.775 8.15,29.6 8.15,20.55 7.575,19.9 7.475,19.675 7.25,19.6 6.85,19.35 5,19.2 2.575,19.225 2.475,19.225
  pour cut-out: 61.275,37.175 61.275,33.5 61.25,33.525 57.1,33.525 56.725,33.775 56.45,33.875 56.35,34.025 55.825,34.575 55.75,34.975 55.675,35.15 55.675,44.2 56.25,44.85 56.35,45.075 56.575,45.15 56.975,45.4 58.825,45.55 61.25,45.525 61.35,45.525
  pour cut-out: 26.225,51 24.983,52.516 27.025,56.4 28.125,57.5 37.4,57.5 38.738,56.162 38.656,56.081 40.401,53.304 38.75,50.9 37.911,50.551 35.956,50.475 32.984,50.475 30.926,50.5 29.072,50.526 27.396,50.602 26.659,50.704
  region net 4V3: 20.258,46.522 20.233,46.573 20.284,46.751 20.36,46.954 20.502,48.669 22.175,48.669 22.341,48.503 22.087,47.411 21.782,46.649 21.706,46.243 21.655,46.116 21.503,45.938 21.3,45.811 21.02,45.735 20.716,45.785 20.69,45.811 20.487,45.938 20.309,46.166 20.258,46.37
  pour cut-out: 44.566,45.862 45.049,45.608 45.455,45.328 46.039,45.201 46.42,44.82 46.293,44.693 46.293,44.211 45.989,43.906 45.989,43.372 45.684,43.068 45.684,42.483 45.455,42.255 45.455,41.493 45.252,41.29 45.252,40.35 45.049,39.981 45.049,39.816 44.617,39.816 44.592,39.791 44.338,39.74 43.855,39.715 43.322,40.096 43.169,40.68 43.042,42.941 43.042,44.82 43.118,45.277 43.423,45.658 43.83,45.862 44.236,45.912
  pour cut-out: 12.4,59.725 9.225,55.602 8.75,54.963 8.975,54.787 10.525,53.442 13.977,57.867 14.35,58.201
  pour cut-out: 52.687,59.762 55.862,55.638 56.337,54.999 56.112,54.823 54.562,53.478 51.11,57.904 50.737,58.238
  pour cut-out: 52.463,5.388 55.638,9.512 56.113,10.151 55.888,10.327 54.338,11.672 50.885,7.246 50.512,6.912
  pour cut-out: 12.449,5.354 9.274,9.478 8.799,10.117 9.024,10.293 10.574,11.638 14.026,7.212 14.399,6.878
  pour cut-out: 30.375,14.475 30.3,14.4 29.575,14.4 29.575,12.45 29.625,12.5 35.025,12.5 35.025,14.45 34.75,14.5 34.175,14.475
  region net NetB2_2: 46.6,51.525 46.05,50.975 46.05,50.825 45.35,50.825 45.275,50.9 45.35,50.975 45.35,51.7 45.7,51.7 46.225,52.225
  region net NetB2_2: 48.1,52.7 48.25,52.8 48.768,53.392 49.3,54.175 49.4,54.625 49.3,54.95 49.125,54.95 48.95,55.125 48.9,55.075 48.55,55.075 47.55,54.075 47.55,53.225
  region net NetB4_1: 16.825,52.775 16.475,53.125 16.475,55.7 16.9,56.125 16.925,56.1 17.775,56.1 17.775,56.075 18.475,55.225 18.55,53.85 18.9,53.5 18.9,52.2 18.6,51.85 18.45,51.75 18.2,51.7
  region net 4V3: 48.213,13 49.122,12.359 50.15,12.275 50.65,12.775 50.025,13.4 49.775,13.7 49.35,14.35
  region net NetB1_1: 47.55,11.8 46.981,11.231 45.544,11.231 44.35,12.425 44.35,13.7 44.375,13.7 44.625,13.95 46.2,13.95 46.625,13.525
  region net 4V3: 16.7,13.825 17.475,14.6 18.125,14.975 18.879,15.447 18.951,15.375 19.65,15.375 19.65,14.35 19.825,14.175 19.375,13.725 18.6,13.725 18.2,13.825 18.1,13.85 17.837,13.866 17.05,13.075
  region net NetB3_2: 18.875,12.925 18.875,11.75 18.7,10.825 18.475,10.125 17.85,8.925 16.975,9.575 16.975,12.375 17.3,12.7
  region net 4V3: 16.7,13.825 16.15,13.575 15.025,13.225 14.322,12.522 14.322,10.253 15.025,9.55 15.125,9.65 15.55,9.65 15.85,11.075 16.4,12.275 16.4,12.425 17.05,13.075
  region net NetB3_2: 11.675,12.675 11.55,12.55 11.55,9.4 13.325,7.625 14.575,7.425 15.65,7.625 15.925,7.9 15.025,8.8 15.025,8.825 14.925,8.825 14.4,9.55 13.375,10.375 13.375,13.5

## Silkscreen, mask and mechanical layers (free items; w line width, h text height)
Top Overlay:
  lines w0.254: 7.571,59.921 8.381,59.921 ; 8.381,59.308 8.381,59.921 ; 9.557,59.871 cw(c8.91,58.504) 8.381,59.921 ; 9.769,6.402 10.141,6.78 10.151,6.78 10.153,6.78 10.531,6.408 ; 9.913,7.327 ccw(c8.738,6.375) 10.215,6.699 ; 53.729,6.73 54.223,7.224 54.269,7.224 ; 54.463,7.674 cw(c55.736,6.857) 54.269,7.224 ; 54.694,6.781 54.269,7.207 54.269,7.224 ; 58.082,59.604 58.457,59.979 58.467,59.979 ; 58.165,60.607 ccw(c56.99,59.654) 58.467,59.979 ; 58.844,59.604 58.469,59.979 58.467,59.979
  lines w0.5: 30.314,16.829 31.714,16.829 ; 33.148,16.817 34.698,16.817 ; 33.898,16.042 33.898,17.642
  text "2" at 56.482,58.918 h1.52
  text "4" at 8.427,57.691 h1.52
  text "1" at 55.482,6.12 h1.52
  text "3" at 8.23,5.689 h1.52
Bottom Overlay:
  text "GND" at 42.661,44.566 h0.76
  text "JTCK" at 43.025,42.6 h0.76
  text "JMS" at 42.725,40.525 h0.76
  text "RX" at 23.975,34.225 h0.76
  text "TX" at 24.075,31.15 h0.76
  text "JMS" at 22.175,16.65 h0.76
  text "JTCK" at 21.85,15.625 h0.76
  text "GND" at 19.875,14.625 h0.76
Top Solder:
  region: 26.25,52.525 27.04,52.669 27.65,53.024 28.107,53.659 28.25,54.5 28.25,56.377 28.285,57.165 28.386,57.292 28.513,57.419 28.85,57.5 29.631,57.52 30.799,57.546 33.009,57.5 36.337,57.495 36.768,57.139 36.75,56.606 36.75,55.971 36.743,55.006 36.75,54.475 36.921,53.71 37.2,53.278 37.556,52.923 38.738,52.526 38.216,52.059 37.937,51.754 37.607,51.602 36.921,51.221 36.438,50.738 30.774,50.738 29.91,51.475 27.726,52.059 27.243,52.212 26.659,52.339
Bottom Solder:
  region: 26.25,52.525 27.04,52.669 27.65,53.024 28.107,53.659 28.25,54.5 28.25,56.377 28.285,57.165 28.386,57.292 28.513,57.419 28.85,57.5 29.631,57.52 30.799,57.546 33.009,57.5 36.337,57.495 36.768,57.139 36.75,56.606 36.75,55.971 36.743,55.006 36.75,54.475 36.921,53.71 37.2,53.278 37.556,52.923 38.738,52.526 38.216,52.059 37.937,51.754 37.607,51.602 36.921,51.221 36.438,50.738 30.291,50.738 28.259,51.348 27.269,51.907 26.951,52.275 26.659,52.339

## Text inside footprints (layer, text, board x,y; h text height)
U1: Top Overlay "STM32" at 30.675,22.6 h0.76